# Altium PCB PCB.PcbDoc
Units mm, origin at the board's own origin, x right, y up, seen from the top; angles counter-clockwise.
Board outline 88 x 48 mm, 2 copper layers (Top Layer, Bottom Layer); 38 components, 39 nets, 214 pads, 13 vias.
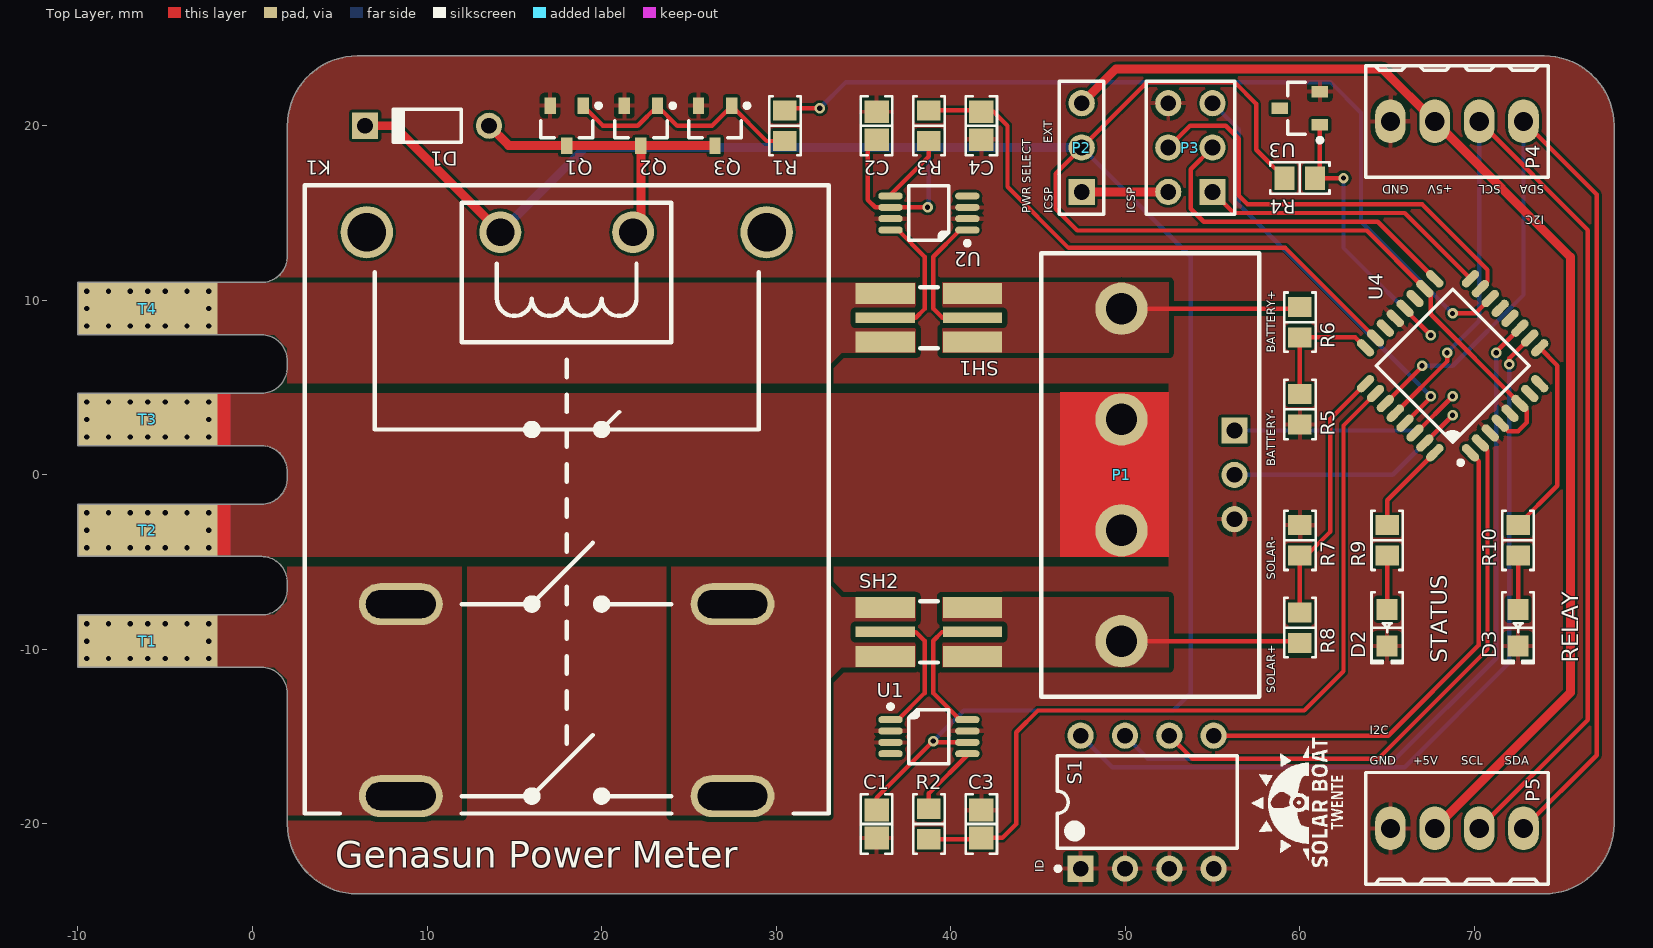
[diagram p0: Top Layer view]
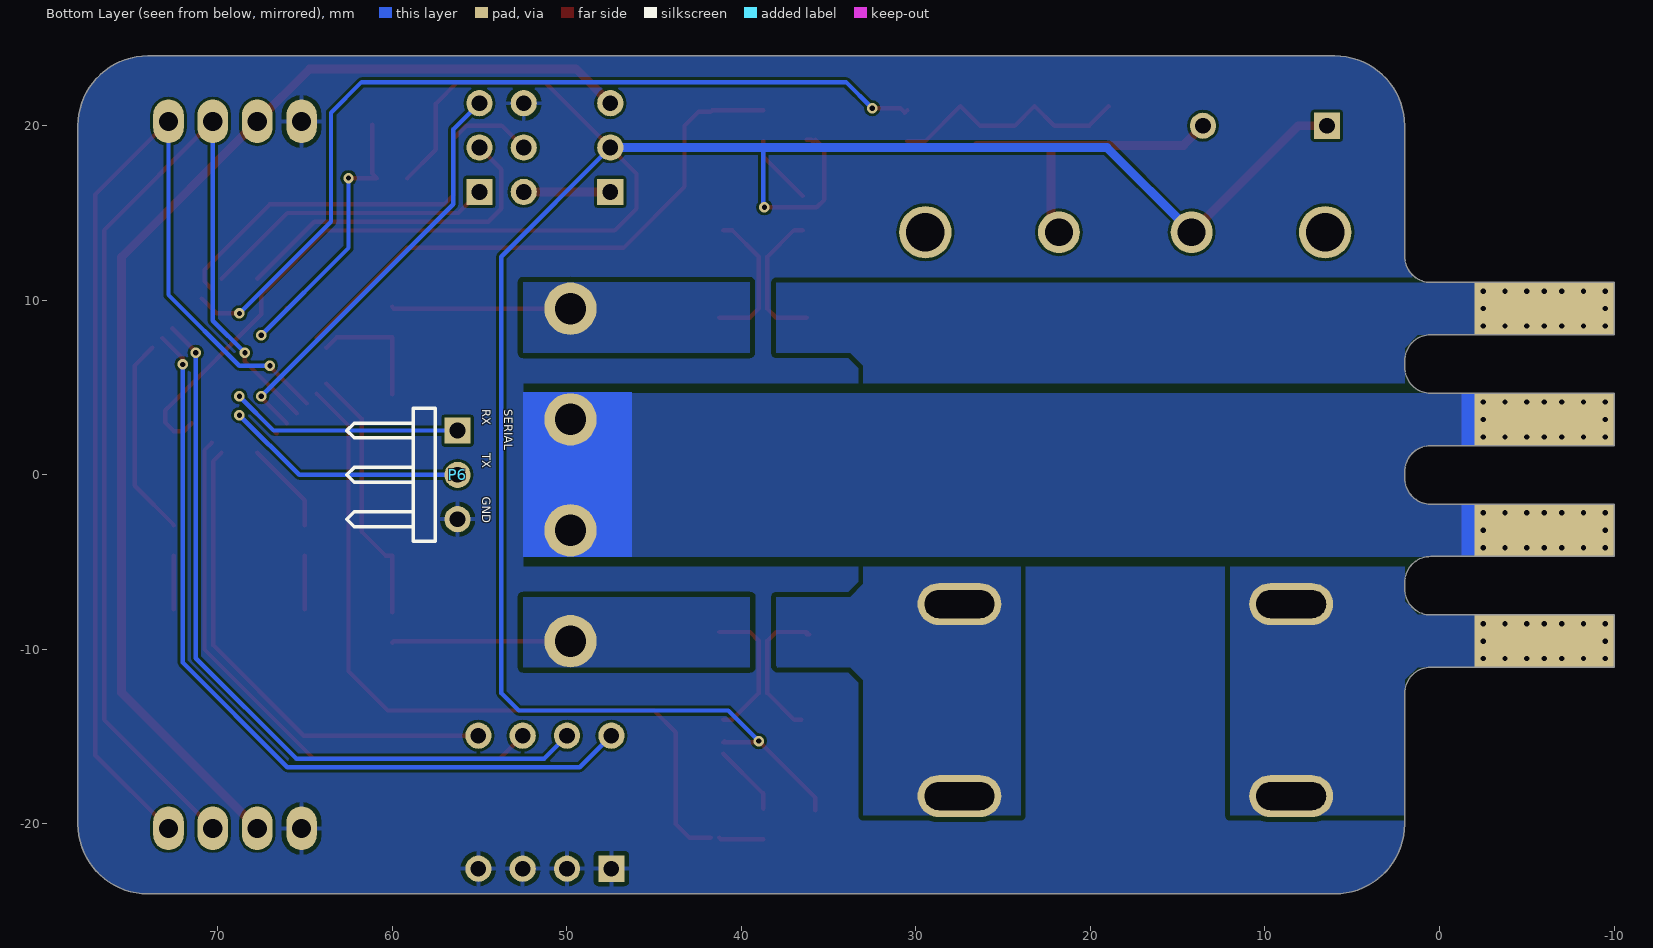
[diagram p1: Bottom Layer view, seen from below]

## Layer stack, top to bottom
Top Solder: solder mask 0.0102, Solder Resist, Dk 3.5
Top Layer: signal copper 0.0356
Dielectric 1: dielectric 0.32, FR-4, Dk 4.8
Bottom Layer: signal copper 0.0356
Bottom Solder: solder mask 0.0102, Solder Resist, Dk 3.5

## Board outline
-10,-11.024 -10,-8.026 0.5,-8.026 ccw(c0.5,-6.526) 2,-6.526 2,-6.174 ccw(c0.5,-6.174) 0.5,-4.674 -10,-4.674 -10,-1.676 0.5,-1.676 ccw(c0.5,-0.176) 2,-0.176 2,0.176 ccw(c0.5,0.176) 0.5,1.676 -10,1.676 -10,4.674 0.5,4.674 ccw(c0.5,6.174) 2,6.174 2,6.526 ccw(c0.5,6.526) 0.5,8.026 -10,8.026 -10,11.024 0.5,11.024 ccw(c0.5,12.524) 2,12.524 2,20 cw(c6,20) 6,24 74,24 cw(c74,20) 78,20 78,-20 cw(c74,-20) 74,-24 6,-24 cw(c6,-20) 2,-20 2,-12.524 ccw(c0.5,-12.524) 0.5,-11.024

## Design rules (kind name [scope] priority, off if disabled: settings)
Clearance Clearance_Poly [InNet('PVout') or InNet('PVin') or InNet('Batin') or InNet('Batout') or InNet('PVswitch')] p1: gap=0.305 ignorepadtopadclearanceinfootprint=FALSE
Clearance [All] p2: gap=0.152 ignorepadtopadclearanceinfootprint=FALSE
Height [All] p1: minheight=0 maxheight=1000 prefheight=10
PolygonConnect PolygonConnect_PWR [InNet('PVout') or InNet('PVin') or InNet('Batin') or InNet('Batout') or InNet('PVswitch')] p1: connectstyle=Direct reliefconductorwidth=0.254 reliefentries=4 polygonreliefangle="90 Angle" airgapwidth=0.254
PolygonConnect [All] p2: connectstyle=Relief reliefconductorwidth=0.254 reliefentries=4 polygonreliefangle="90 Angle" airgapwidth=0.254
RoomDefinition Schematic [InComponentClass('Schematic')] p1: confinementstyle=ConfineIn formatcopy=TRUE lockcomponents=FALSE outline -39.9,-62.1 182.9,-62.1 182.9,72.2 -39.9,72.2
RoutingVias [All] p1: holewidth=0.3 width=0.6 viastyle="Through Hole" minholewidth=0.3 minwidth=0.6 maxholewidth=0.711 maxwidth=1.27
SolderMaskExpansion [All] p1: expansion=0.102
Width [All] p1: maxlimit=25.4 minlimit=0.254 preferedwidth=0.254 minimp=50.000000 maximp=50.000000 favimp=50.000000
29 further rules are at their usual default settings.

## Components (designator, comment, footprint, x,y, rotation, side; value= is the part's Value field where it differs from the comment)
C1 "Cap" "CAP 0805/2012" 35.75,-20 r90 top value=100nF (schematic designator C3)
C2 "Cap" "CAP 0805/2012" 35.75,20 r270 top value=100nF (schematic designator C3)
C3 "Cap" "CAP 0805/2012" 41.75,-20 r270 top value=100nF (schematic designator C2)
C4 "Cap" "CAP 0805/2012" 41.75,20 r90 top value=100nF (schematic designator C6)
D1 "Diode 1N4148" DO-35 10,20 r180 top (schematic designator D3)
D2 "LED" "LED 0805/2012 RED" 65,-8.75 r270 top
D3 "LED" "LED 0805/2012 RED" 72.5,-8.75 r270 top (schematic designator D1)
K1 "HE-S" "Relay HE-S Parasonic" 18,-2.25 r0 top
P1 "Header 4" "4Pin 6.35mm Connector" 49.784,0 r90 top (schematic designator P6)
P2 "PWR" HDR1X3 47.5,16.21 r90 top (schematic designator P3)
P3 "ICSP" HDR2X3 55,16.21 r90 top (schematic designator P2)
P4 "Header 4" "TE 282834-4" 69,20.25 r0 top (schematic designator P1)
P5 "Header 4" "TE 282834-4" 69,-20.25 r180 top (schematic designator P4)
P6 "PWR" HDR1X3H 56.25,2.54 r270 bottom (schematic designator P4)
Q1 "MOSFET-N" "DIODES SOT-23-3" 18,20 r270 top
Q2 "MOSFET-N" "DIODES SOT-23-3" 22.25,20 r270 top (schematic designator Q3)
Q3 "MOSFET-N" "DIODES SOT-23-3" 26.5,20 r270 top (schematic designator Q2)
R1 "Res2" "RES 0805/2012" 30.5,20 r90 top value=330 (schematic designator R9)
R2 "Res2" "RES 0805/2012" 38.75,-20 r90 top value=330 (schematic designator R8)
R3 "Res2" "RES 0805/2012" 38.75,20 r270 top value=330 (schematic designator R10)
R4 "Res2" "RES 0805/2012" 60,17 r180 top value=1K3 (schematic designator R7)
R5 "Res2" "RES 0805/2012" 60,3.75 r90 top value=1K8 (schematic designator R4)
R6 "Res2" "RES 0805/2012" 60,8.75 r90 top value=51K (schematic designator R2)
R7 "Res2" "RES 0805/2012" 60,-3.75 r270 top value=1K8 (schematic designator R3)
R8 "Res2" "RES 0805/2012" 60,-8.75 r270 top value=51K (schematic designator R1)
R9 "Res2" "RES 0805/2012" 65,-3.75 r90 top value=330 (schematic designator R6)
R10 "Res2" "RES 0805/2012" 72.5,-3.75 r90 top value=330 (schematic designator R5)
S1 "SW-DIP4" DIP-8 51.25,-18.75 r90 top
SH1 "Kevin Resistor" "TE TLR Shunt" 38.75,9 r180 top locked (schematic designator SH2)
SH2 "Kevin Resistor" "TE TLR Shunt" 38.75,-9 r0 top locked (schematic designator SH1)
T1 "PV" PCB_Pin_Outsteeksel -6,-9.525 r0 top
T2 "GND" PCB_Pin_Outsteeksel -6,-3.175 r180 top (schematic designator T4)
T3 "GND" PCB_Pin_Outsteeksel -6,3.175 r180 top
T4 "Bat" PCB_Pin_Outsteeksel -6,9.525 r0 top (schematic designator T2)
U1 "AD8418" "INTERSIL MSOP-8 M8.118" 38.75,-15 r0 top (schematic designator U3)
U2 "AD8418" "INTERSIL MSOP-8 M8.118" 38.75,15 r180 top (schematic designator U4)
U3 "ZR40401F41" "DIODES SOT-23-3" 60,21 r180 top (schematic designator U2)
U4 "Atmega328P" "ST LQFP-32 7X7MM" 68.75,6.25 r135 top locked (schematic designator U1)

## Footprints (in the part's own frame and the unit in brackets; to place one, negate y for a bottom-side part, rotate by r counter-clockwise, add the part's x,y. Pads: shape width x height; smd on the part's side, far side on the other; paste and mask are expansions set on the pad)
"4Pin 6.35mm Connector" [mm]
  round 3 hole 1.8 paste+0: 1(-9.525,0) 2(-3.175,0) 3(3.175,0) 4(9.525,0)
  silkscreen extent -12.7,-7.9 12.7,4.6, body extent -13.27,-8 12.7,4.5, height 21.5
"CAP 0805/2012" [mm] "Chip Capacitor, 2-Leads, Body 2.00x1.20mm, IPC Medium Density"
  rect 1.3x1.4 smd: 1(-0.8,0) 2(0.8,0)
  silkscreen extent -1.7,-0.9 1.7,0.9, body extent -1,-0.64 1,0.64, height 1.26
"DIODES SOT-23-3" [mm] "SOT23, 3-Leads, Body 2.90x2.40mm, Pitch 0.95mm, IPC Medium Density"
  rect 0.95x0.65 smd: 1(-1.15,0.95) 2(1.15,0) 3(-1.15,-0.95)
  silkscreen extent -1.27,-1.5 0.7,1.95, body extent -1.41,-1.45 1.41,1.45, height 1.5
DIP-8 [mm] "DIP; 8 Leads; Row Spacing 7.62 mm; Pitch 2.54 mm"
  rect 1.5x1.5 hole 0.9: 1(-3.81,3.81)
  round 1.5 hole 0.9: 2(-3.81,1.27) 3(-3.81,-1.27) 4(-3.81,-3.81) 5(3.81,-3.81) 6(3.81,-1.27) 7(3.81,1.27) 8(3.81,3.81)
  silkscreen extent -3.93,-5.15 2.65,5.23, body extent -3.6,-5.15 3.6,5.15, height 5.08
DO-35 [mm] "Diode, Axial; Body 3.8 x 1.9 mm (LxDia. max), Lead Dia. 0.53 mm (max)"
  round 1.5 hole 0.9: 1(-3.55,0)
  rect 1.5x1.5 hole 0.9: 2(3.55,0)
  silkscreen extent -1.95,-0.95 2.05,0.95
HDR1X3 [mm] "Connector; Header; 3 Position"
  rect 1.5x1.5 hole 0.9: 1(0,0)
  round 1.5 hole 0.9: 2(2.54,0) 3(5.08,0)
  silkscreen extent -1.27,-1.27 6.35,1.27
HDR1X3H [mm]
  rect 1.5x1.5 hole 0.9: 1(0,0)
  round 1.5 hole 0.9: 2(2.54,0) 3(5.08,0)
  silkscreen extent -1.27,-6.35 6.35,-1.27
HDR2X3 [mm] "Connector; Header; 3x2 Position"
  rect 1.5x1.5 hole 0.9: 1(0,0)
  round 1.5 hole 0.9: 2(0,2.54) 3(2.54,0) 4(2.54,2.54) 5(5.08,0) 6(5.08,2.54)
  silkscreen extent -1.27,-1.27 6.35,3.81
"INTERSIL MSOP-8 M8.118" [mm] "MSOP, 8-Leads, Body 3.00x3.00mm, Pitch 0.65mm, IPC Medium Density"
  oval 1.4x0.4 smd: 1(-2.2,0.975) 2(-2.2,0.325) 3(-2.2,-0.325) 4(-2.2,-0.975) 5(2.2,-0.975) 6(2.2,-0.325) 7(2.2,0.325) 8(2.2,0.975)
  silkscreen extent -2.32,-1.55 1.15,1.85, body extent -2.46,-1.5 2.46,1.5, height 1.1
"LED 0805/2012 RED" [mm] "Chip Diode, 2-Leads, Body 2.00x1.25mm, IPC Medium Density"
  rect 1.2x1.2 smd: 1(-1.05,0) 2(1.05,0)
  silkscreen extent -2.03,-0.9 2.03,0.9, body extent -1,-0.62 1,0.63, height 0.9
PCB_Pin_Outsteeksel [mm]
  round 0.6 hole 0.3: 1(-3.5,-1) 1(-3.5,0) 1(-3.5,1) 1(-2.25,-1) 1(-2.25,1) 1(-1,-1) 1(-1,1) 1(0,-1) 1(0,1) 1(1,-1) 1(1,1) 1(2.25,-1) 1(2.25,1) 1(3.5,-1) 1(3.5,0) 1(3.5,1)
  rect 8x3 all layers, no hole: 1(0,0)
"Relay HE-S Parasonic" [mm]
  oval 4.8x2.4 hole 1.6 slot 4 at 0 deg: 1(-9.5,-16.15) 2(-9.5,-5.15) 7(9.5,-5.15) 8(9.5,-16.15)
  round 3 hole 2.2: 3(-11.45,16.15) 6(11.45,16.15)
  round 2.4 hole 1.6: 4(-3.8,16.15) 5(3.8,16.15)
  silkscreen extent -15,-17.15 15,18.85, body extent -15,-17.15 15,18.85, height 40
"RES 0805/2012" [mm] "Chip Resistor, 2-Leads, Body 2.00x1.25mm, IPC Medium Density"
  rect 1.15x1.35 smd: 1(-0.875,0) 2(0.875,0)
  silkscreen extent -1.7,-0.9 1.7,0.9, body extent -0.95,-0.62 1.05,0.63, height 0.6
"ST LQFP-32 7X7MM" [mm] "LQFP, 32-Leads, Body 7.00x7.00mm, Pitch 0.80mm, IPC Medium Density"
  oval 1.2x0.5 smd: 1(-4.25,2.8) 2(-4.25,2) 3(-4.25,1.2) 4(-4.25,0.4) 5(-4.25,-0.4) 6(-4.25,-1.2) 7(-4.25,-2) 8(-4.25,-2.8) 17(4.25,-2.8) 18(4.25,-2) 19(4.25,-1.2) 20(4.25,-0.4) 21(4.25,0.4) 22(4.25,1.2) 23(4.25,2) 24(4.25,2.8)
  oval 0.5x1.2 smd: 9(-2.8,-4.25) 10(-2,-4.25) 11(-1.2,-4.25) 12(-0.4,-4.25) 13(0.4,-4.25) 14(1.2,-4.25) 15(2,-4.25) 16(2.8,-4.25) 25(2.8,4.25) 26(2,4.25) 27(1.2,4.25) 28(0.4,4.25) 29(-0.4,4.25) 30(-1.2,4.25) 31(-2,4.25) 32(-2.8,4.25)
  silkscreen extent -4.37,-3.1 3.1,3.72, body extent -4.51,-4.51 4.51,4.51, height 1.55
"TE 282834-4" [mm]
  oval 1.75x2.5 hole 1.1: 1(-3.81,0) 2(-1.27,0) 3(1.27,0) 4(3.81,0)
  silkscreen extent -5.24,-3.2 5.24,3.2, body extent -5.31,-3.25 5.31,3.25, height 10
"TE TLR Shunt" [mm]
  rect 3.4x1.2 smd: 1(-2.5,-1.4) 1(-2.5,1.4) 3(2.5,-1.4) 3(2.5,1.4)
  rect 3.4x0.6 smd: 2(-2.5,0) 4(2.5,0)
  silkscreen extent -0.5,-1.75 0.5,1.75, body extent -3.2,-1.65 3.2,1.65, height 0.65

## Part data
C1 C2 C3 C4: "Capacitor", LatestRevisionDate=17-Jul-2002, LatestRevisionNote="Re-released for DXP Platform.", PackageDescription="Radial Cap, Thru-Hole; 2 Leads; 0.3 in Pin Spacing", PackageReference=RAD-0.3, Published=8-Jun-2000, Publisher="Altium Limited"
D1: "High Conductance Fast Diode", Code_JEDEC=DO-204-AH, ComponentLink1Description="Manufacturer Link", ComponentLink1URL=http://www.fairchildsemi.com/, ComponentLink2Description=Datasheet, ComponentLink2URL=http://www.fairchildsemi.com/ds/1N%2F1N4148.pdf, DatasheetVersion=1997, LatestRevisionDate=17-Jul-2002, LatestRevisionNote="Re-released for DXP Platform.", PackageDescription="Diode, Axial; Body 3.8 x 1.9 mm (LxDia. max), Lead Dia. 0.53 mm (max)", PackageReference=DO-35, Published=8-Jun-2000, Publisher="Altium Limited"
D2 D3: library part LED0, "Typical INFRARED GaAs LED", LatestRevisionDate=08-Jul-2005, LatestRevisionNote="Mech Layer 1 removed.", PackageDescription="LED; 2 Leads", PackageReference=LED-0, Published=8-Jun-2000, Publisher="Altium Limited"
K1: library part Relay-DPST, "Dual-Pole Single-Throw Relay", LatestRevisionDate=17-Jul-2002, LatestRevisionNote="Re-released for DXP Platform.", PackageReference=MODULE6, Published=24-Mar-1999, Publisher="Altium Limited"
P1 P4 P5: "Header, 4-Pin", LatestRevisionDate=17-Jul-2002, LatestRevisionNote="Re-released for DXP Platform.", Publisher="Altium Limited"
P2 P6: library part "Header 3", "Header, 3-Pin", LatestRevisionDate=17-Jul-2002, LatestRevisionNote="Re-released for DXP Platform.", Publisher="Altium Limited"
P3: library part "Header 3X2", "Header, 3-Pin, Dual row", LatestRevisionDate=17-Jul-2002, LatestRevisionNote="Re-released for DXP Platform.", Publisher="Altium Limited"
Q1 Q2 Q3: "N-Channel MOSFET", LatestRevisionDate=17-Jul-2002, LatestRevisionNote="Re-released for DXP Platform.", PackageDescription="TO, Flat Index; 3 In-Line, Axial Leads; Body Dia. 4.6mm; Lead Dia. 0.5 mm (max)", PackageReference=E3, PackageVersion=1995/1996, Published=8-Jun-2000, Publisher="Altium Limited"
R1 R2 R3 R4 R5 R6 R7 R8 R9 R10: "Resistor", LatestRevisionDate=17-Jul-2002, LatestRevisionNote="Re-released for DXP Platform.", PackageDescription="Axial Device, Thru-Hole; 2 Leads; 0.4 in Pin Spacing", PackageReference=AXIAL-0.4, Published=8-Jun-2000, Publisher="Altium Limited"
S1: "DIP Switch", LatestRevisionDate=17-Jul-2002, LatestRevisionNote="Re-released for DXP Platform.", PackageReference=DIP-8, Published=24-Mar-1999, Publisher="Altium Limited"
T1 T2 T3 T4: library part Socket, "Socket", LatestRevisionDate=17-Jul-2002, LatestRevisionNote="Re-released for DXP Platform.", Publisher="Altium Limited"
U3: library part "Diode 10TQ035", "Schottky Rectifier", ComponentLink1Description="Manufacturer Link", ComponentLink1URL=http://www.irf.com/, ComponentLink2Description=Datasheet, ComponentLink2URL=http://www.irf.com/product-info/datasheets/data/10tq.pdf, DatasheetVersion=PD-2.057B, LatestRevisionDate=17-Jul-2002, LatestRevisionNote="Re-released for DXP Platform.", Note="Terminal 2 is the TAB and is electrically connected to the cathode", PackageDescription="TO, Thru-Hole, Vertical, Heatsink Mounted; 3 In-Line Leads (1 Absent); Pitch 2.54 mm", PackageReference=TO-220AC, PackageVersion=Feb-1998, Published=8-Jun-2000, Publisher="Altium Limited"

## Via types
v1: diameter 0.6, hole 0.3, Top Layer to Bottom Layer, 13 vias

## Nets (pads, with @x,y where several pads share a name; then routed paths per layer and width w, separated by ;. In a path a pad name is that pad's centre, name@x,y a point inside that pad or via, vN(x,y) a via of type N, cw(c..) or ccw(c..) an arc to the next point about the centre after c; other vN are vias at no path point)
Batin: SH1.3 T4.1
Batout: P1.4 R6.2 SH1.1 | length 10.3
  Top Layer w0.254: P1.4 59.9,9.525 R6.2
EX: P2.3 P4.2 P5.3 | length 69.2
  Top Layer w0.508: P2.3 49.46,23.25 64.73,23.25 P4.2 75.5,12.48 75.5,-12.48 P5.3
GND: C1.1 C2.1 C3.1 C4.1 D2.2 D3.2 P1.2 P1.3 P3.6 P4.1 P5.4 P6.3 Q1.3 Q2.3 Q3.3 R5.1 R7.1 S1.1 S1.2 S1.3 S1.4 T2.1 T3.1 U1.2 U1.3 U1.7 U2.2 U2.3 U2.7 U3.3 U4.3 U4.5 U4.21
ICSP_MISO: P3.1 U4.16 | length 16.8
  Top Layer w0.254: P3.1 56.21,15 66.01,15 U4.16
ICSP_MOSI: P3.4 U4.15 | length 25.4
  Top Layer w0.254: P3.4 53.71,20 55.75,20 56.5,19.25 56.5,16 57,15.5 67,15.5 70.75,11.75 70.75,11.078 U4.15
ICSP_PWR: P2.1 P3.2 | length 5
  Top Layer w0.508: P2.1 P3.2
ICSP_RESET: P3.5 U4.29 | length 24.1
  Top Layer w0.254: U4.29 67.5,4.434 v1(67.5,4.5)
  Bottom Layer w0.254: P3.5 56.5,19.79 56.5,15.5 v1(67.5,4.5)
ICSP_SCK: P3.3 U4.17 | length 19.7
  Top Layer w0.254: P3.3 53.75,17.5 53.75,15.25 54.5,14.5 64.46,14.5 U4.17
ISensBat: C4.2 R3.1 U4.23 | length 33
  Top Layer w0.254: R3.1 41.675,20.875 C4.2 42.45,20.8 43.25,20 43.25,16.5 46.75,13 59.172,13 U4.23
ISensPV: C3.2 R2.1 U4.26 | length 47
  Top Layer w0.254: R2.1 41.175,-20.875 C3.2@41.25,-20.8 ; C3.2 42.95,-20.8 43.75,-20 43.75,-14.75 45,-13.5 60.25,-13.5 62.5,-11.25 62.5,2.828 U4.26
LED1: R10.2 U4.9 | length 11.5
  Top Layer w0.254: R10.2 74.75,-0.625 74.75,6.26 U4.9
LED2: R9.2 U4.32 | length 5.3
  Top Layer w0.254: R9.2 65,-1.46 U4.32
NetD1_1: D3.1 R10.1 | length 3.1
  Top Layer w0.254: D3.1 R10.1
NetD2_1: D2.1 R9.1 | length 3.1
  Top Layer w0.254: D2.1 R9.1
NetD3_1: D1.1 K1.5 Q1.2 Q2.2 Q3.2 | length 18.5
  Top Layer w0.508: D1.1 14.675,18.875 Q3.2@26.5,18.875 ; K1.5@21.75,13.95 22.25,14.45 Q2.2@22.25,18.875
NetQ1_3: Q1.1 Q2.1 Q3.1 R1.1 | length 14.2
  Top Layer w0.254: Q1.1@18.95,21.125 20.075,20 22.075,20 23.2,21.125 24.325,20 26.325,20 27.45,21.125 29.45,19.125 R1.1
NetR8_2: R2.2 U1.5 | length 4.1
  Top Layer w0.254: R2.2 38.75,-18.25 U1.5@41.025,-15.975
NetR10_2: R3.2 U2.5 | length 4.1
  Top Layer w0.254: U2.5@36.475,15.975 38.75,18.25 R3.2
NetSH1_2: SH2.2 U1.1 | length 8.2
  Top Layer w0.254: SH2.2@36.108,-9.144 SH2.2@36.25,-9.144 ; SH2.2 38,-9 38.5,-9.5 38.5,-12.5 36.975,-14.025 U1.1
NetSH1_4: SH2.4 U1.8 | length 8.1
  Top Layer w0.254: U1.8@41.025,-14.025 40.754,-14.025 40.525,-14.025 39,-12.5 39,-9.5 39.5,-9 SH2.4
NetSH2_2: SH1.2 U2.1 | length 8.1
  Top Layer w0.254: U2.1@41.025,14.025 40.525,14.025 39,12.5 39,9.525 39.525,9 SH1.2
NetSH2_4: SH1.4 U2.8 | length 8.1
  Top Layer w0.254: SH1.4 38,9 38.5,9.5 38.5,12.5 36.975,14.025 U2.8@36.475,14.025
PVin: P1.1 R8.2 SH2.3 | length 10.6
  Top Layer w0.254: P1.1@50.024,-9.285 P1.1 59.9,-9.525 R8.2
PVout: K1.1 K1.2 T1.1
PVswitch: K1.7 K1.8 SH2.1
Relay: R1.2 U4.14 | length 50.7
  Top Layer w0.254: R1.2 30.625,20.75 30.875,21 v1(32.5,21) ; v1(68.75,9.25) 70.053,9.25 U4.14
  Bottom Layer w0.254: v1(32.5,21) 34,22.5 61.75,22.5 63.5,20.75 63.5,14.5 v1(68.75,9.25)
RXD: P6.1 U4.30 | length 16.3
  Top Layer w0.254: U4.30 66.646,2.396 v1(68.75,4.5)
  Bottom Layer w0.254: P6.1 66.79,2.54 v1(68.75,4.5)
SCL: P4.3 P5.2 U4.28 | length 64.4
  Top Layer w0.254: U4.28 68.434,6.5 v1(68.434,7) ; P5.2 76.5,-14.02 76.5,14.02 P4.3
  Bottom Layer w0.254: v1(68.434,7) 70.27,8.836 P4.3
SDA: P4.4 P5.1 U4.27 | length 64.5
  Top Layer w0.254: U4.27 67.053,6.25 v1(67,6.25) ; P5.1 77,-16.06 77,16.06 P4.4
  Bottom Layer w0.254: v1(67,6.25) 68.75,6.25 72.81,10.31 P4.4
SW1: S1.5 U4.1 | length 28.6
  Top Layer w0.254: S1.5 65.06,-14.94 70.25,-9.75 70.25,0.79 U4.1
SW2: S1.6 U4.2 | length 33.4
  Top Layer w0.254: S1.6 53.83,-16.25 64.5,-16.25 70.75,-10 70.75,1.422 U4.2
SW3: S1.7 U4.11 | length 43.7
  Top Layer w0.254: v1(71.25,7) 71.25,7.053 U4.11
  Bottom Layer w0.254: S1.7 51.29,-16.25 65.5,-16.25 71.25,-10.5 v1(71.25,7)
SW4: S1.8 U4.10 | length 46.9
  Top Layer w0.254: v1(72,6.328) 72,6.672 U4.10
  Bottom Layer w0.254: S1.8 49.25,-16.75 66,-16.75 72,-10.75 v1(72,6.328)
TXD: P6.2 U4.31 | length 16.2
  Top Layer w0.254: U4.31 v1(68.75,3.422)
  Bottom Layer w0.254: P6.2 65.328,0 v1(68.75,3.422)
VCC: C1.2 C2.2 D1.2 K1.4 P2.2 R4.2 U1.6 U2.6 U4.4 U4.6 U4.18 | length 170
  Top Layer w0.254: C1.2 35.75,-18.5 38.925,-15.325 41.025,-15.325 U1.6@40.95,-15.25 ; C2.2 35.25,18.7 35.25,15.75 35.675,15.325 v1(38.675,15.325) ; C2.2@35.875,19.075 36,19.2 C2.2@36.25,19.2 ; R4.2 57.5,18.625 57.5,21.25 56.25,22.5 51.25,22.5 P2.2 46,17.25 46,15.25 47.25,14 63.828,14 U4.18 67.5,10.328 67.5,9.197 U4.6 73,3.697 73,3 72.5,2.5 71.934,2.5 U4.4
  Top Layer w0.508: D1.2 8.1,20 K1.4
  Bottom Layer w0.254: v1(38.675,15.325) 38.75,15.4 38.75,18.75 ; v1(39,-15.25) 40.75,-13.5 52.75,-13.5 53.75,-12.5 53.75,12.5 P2.2
  Bottom Layer w0.508: K1.4 19.05,18.75 38.75,18.75 P2.2
Vref: R4.1 U3.1 U4.20 | length 18
  Top Layer w0.254: U3.1 61.15,17.275 R4.1 v1(62.5,17) ; U4.20 66.028,9.472 v1(67.5,8)
  Bottom Layer w0.254: v1(62.5,17) 62.5,13 v1(67.5,8)
VSensBat: R5.2 R6.1 U4.24 | length 7.3
  Top Layer w0.254: R5.2 R6.1 63.165,7.875 U4.24
VSensPV: R7.2 R8.1 U4.25 | length 14.9
  Top Layer w0.254: R8.1 R7.2 60.375,-4.625 61.75,-3.25 61.75,3.21 U4.25
pads on no net: K1.3 K1.6 U1.4 U2.4 U3.2 U4.7 U4.8 U4.12 U4.13 U4.19 U4.22

## Polygon pours and split planes (outlines as drawn)
PVin on Bottom Layer "PVIN_L02_P020" (solid, pour order 20): 52.5,-7 52.5,-11.024 39.5,-11.024 39.5,-7
Batout on Bottom Layer "BATOUT_L02_P028" (solid, pour order 28): 39.525,11.024 52.5,11.024 52.5,7 39.525,7
Batin on Bottom Layer "BATIN_L02_P030" (solid, pour order 30): -3,10.998 -3,8.026 1.25,8.026 2,7.25 2,5.25 33,5.25 33,6.25 33.75,7 38,7 38,10.998
PVout on Bottom Layer "PVOUT_L02_P032" (solid, pour order 32): -2.5,-8.026 -2.5,-11.02 1.25,-11.02 2,-11.75 2,-19.5 12,-19.5 12,-5.25 2,-5.25 2,-7.25 1.25,-8.026
GND on Bottom Layer "GND_L02_P034" (solid, pour order 34): -2.5,4.674 -2.5,1.676 1.25,1.75 2,0.976 2,-0.976 1.25,-1.715 -2.5,-1.715 -2.5,-4.674 2,-4.7 52.5,-4.7 52.5,4.674
PVswitch on Bottom Layer "PVSWITCH_L02_P036" (solid, pour order 36): 24,-19.5 24,-5.25 33,-5.25 33,-6.25 33.75,-7 38,-7 38,-11.036 33.75,-11.024 33,-11.774 33,-19.5
GND on Bottom Layer "GND_L02_P039" (solid, pour order 39): -10,-11.024 -10,-8.026 0.5,-8.026 ccw(c0.5,-6.526) 2,-6.526 2,-6.174 ccw(c0.5,-6.174) 0.5,-4.674 -10,-4.674 -10,-1.676 0.5,-1.676 ccw(c0.5,-0.176) 2,-0.176 2,0.176 ccw(c0.5,0.176) 0.5,1.676 -10,1.676 -10,4.674 0.5,4.674 ccw(c0.5,6.174) 2,6.174 2,6.526 ccw(c0.5,6.526) 0.5,8.026 -10,8.026 -10,11.024 0.5,11.024 ccw(c0.5,12.524) 2,12.524 2,20 cw(c6,20) 6,24 74,24 cw(c74,20) 78,20 78,-20 cw(c74,-20) 74,-24 6,-24 cw(c6,-20) 2,-20 2,-12.524 ccw(c0.5,-12.524) 0.5,-11.024
Batout on Top Layer "BATOUT_L01_P010" (solid, pour order 10): 39.525,11.024 52.5,11.024 52.5,7 39.525,7
PVswitch on Top Layer "PVSWITCH_L01_P006" (solid, pour order 6): 24,-19.5 24,-5.25 33,-5.25 33,-6.25 33.75,-7 38,-7 38,-11.036 33.75,-11.024 33,-11.774 33,-19.5
GND on Top Layer "GND_L01_P016" (solid, pour order 16): -2.5,4.674 -2.5,1.676 1.25,1.75 2,0.976 2,-0.976 1.25,-1.715 -2.5,-1.715 -2.5,-4.674 2,-4.7 52.5,-4.7 52.5,4.674
PVout on Top Layer "PVOUT_L01_P002" (solid, pour order 2): -2.5,-8.026 -2.5,-11.02 1.25,-11.02 2,-11.75 2,-19.5 12,-19.5 12,-5.25 2,-5.25 2,-7.25 1.25,-8.026
no net on Top Layer "NONET_L01_P004" (solid, pour order 4): -1.75,-8.75
no net on Top Layer "NONET_L01_P014" (solid, pour order 14): 24,5.5
PVin on Top Layer "PVIN_L01_P008" (solid, pour order 8): 52.5,-7 52.5,-11.024 39.5,-11.024 39.5,-7
Batin on Top Layer "BATIN_L01_P012" (solid, pour order 12): -3,10.998 -3,8.026 1.25,8.026 2,7.25 2,5.25 33,5.25 33,6.25 33.75,7 38,7 38,10.998
GND on Top Layer "GND_L01_P038" (solid, pour order 38): -10,-11.024 -10,-8.026 0.5,-8.026 ccw(c0.5,-6.526) 2,-6.526 2,-6.174 ccw(c0.5,-6.174) 0.5,-4.674 -10,-4.674 -10,-1.676 0.5,-1.676 ccw(c0.5,-0.176) 2,-0.176 2,0.176 ccw(c0.5,0.176) 0.5,1.676 -10,1.676 -10,4.674 0.5,4.674 ccw(c0.5,6.174) 2,6.174 2,6.526 ccw(c0.5,6.526) 0.5,8.026 -10,8.026 -10,11.024 0.5,11.024 ccw(c0.5,12.524) 2,12.524 2,20 cw(c6,20) 6,24 74,24 cw(c74,20) 78,20 78,-20 cw(c74,-20) 74,-24 6,-24 cw(c6,-20) 2,-20 2,-12.524 ccw(c0.5,-12.524) 0.5,-11.024

## Other copper
Top Layer:
  rectangle net GND: 46.25,-4.7 52.5,4.75
  rectangle net GND: -2.5,1.71 -1.25,4.674
  rectangle net GND: -2.5,-4.674 -1.25,-1.676
  pour cut-out: 0.647,-4.681 1.682,-5.25 52.5,-5.25 52.5,-4.7
  pour cut-out: 0.647,4.681 1.682,5.25 52.5,5.25 52.5,4.7
Bottom Layer:
  rectangle net GND: 46.25,-4.7 52.5,4.75
  rectangle net GND: -2.5,1.676 -1.25,4.674
  rectangle net GND: -2.5,-4.675 -1.25,-1.676
  pour cut-out: 0.647,-4.681 1.682,-5.25 52.5,-5.25 52.5,-4.7
  pour cut-out: 0.647,4.681 1.682,5.25 52.5,5.25 52.5,4.7

## Silkscreen, mask and mechanical layers (free items; w line width, h text height)
Top Overlay:
  drawing of 1276 lines, arcs and shapes, not listed
  text "EXT" at 46,19 h0.81 r90
  text "GND" at 66.25,16.767 h0.81 r180
  text "+5V" at 68.75,16.767 h0.81 r180
  text "SCL" at 71.5,16.767 h0.81 r180
  text "SDA" at 74,16.767 h0.81 r180
  text "PWR SELECT" at 44.75,15 h0.81 r90
  text "ICSP" at 46.017,15 h0.81 r90
  text "ICSP" at 50.75,15 h0.81 r90
  text "I2C" at 74,15.017 h0.81 r180
  text "BATTERY+" at 58.75,7 h0.81 r90
  text "BATTERY-" at 58.75,0.5 h0.81 r90
  text "SOLAR-" at 58.75,-6 h0.81 r90
  text "STATUS" at 68.75,-10.75 h1.63 r90
  text "RELAY" at 76.25,-10.75 h1.63 r90
  text "SOLAR+" at 58.75,-12.5 h0.81 r90
  text "I2C" at 64,-15.017 h0.81
  text "GND" at 64,-16.767 h0.81
  text "+5V" at 66.5,-16.767 h0.81
  text "SCL" at 69.25,-16.767 h0.81
  text "SDA" at 71.75,-16.767 h0.81
  text "Genasun Power Meter" at 4.75,-22.5 h1.52
  text "ID" at 45.5,-22.75 h0.81 r90
Bottom Overlay:
  text "SERIAL" at 53.75,3.75 h0.81 r90
  text "RX" at 55,3.75 h0.81 r90
  text "TX" at 55,1.25 h0.81 r90
  text "GND" at 55,-1.25 h0.81 r90
Mechanical 1:
  lines w0.254: 78,-20 cw(c74,-20) 74,-24 6,-24 cw(c6,-20) 2,-20 2,-12.524 ccw(c0.5,-12.524) 0.5,-11.024 -10,-11.024 -10,-8.026 0.5,-8.026 ccw(c0.5,-6.526) 2,-6.526 2,-6.174 ccw(c0.5,-6.174) 0.5,-4.674 -10,-4.674 -10,-1.676 0.5,-1.676 ccw(c0.5,-0.176) 2,-0.176 2,0.176 ccw(c0.5,0.176) 0.5,1.676 -10,1.676 -10,4.674 0.5,4.674 ccw(c0.5,6.174) 2,6.174 2,6.526 ccw(c0.5,6.526) 0.5,8.026 -10,8.026 -10,11.024 0.5,11.024 ccw(c0.5,12.524) 2,12.524 2,20 cw(c6,20) 6,24 74,24 cw(c74,20) 78,20 ; 78,-20 78,0 78,20